# Altium PCB PowerMeter-v2.PcbDoc
Units mm, origin at the board's own origin, x right, y up, seen from the top; angles counter-clockwise.
Board outline 35 x 45 mm, 2 copper layers (Top Layer (Base Layer 1), Bottom Layer), stack 1.4 mm thick; 22 components, 44 nets, 48 pads, 17 vias.
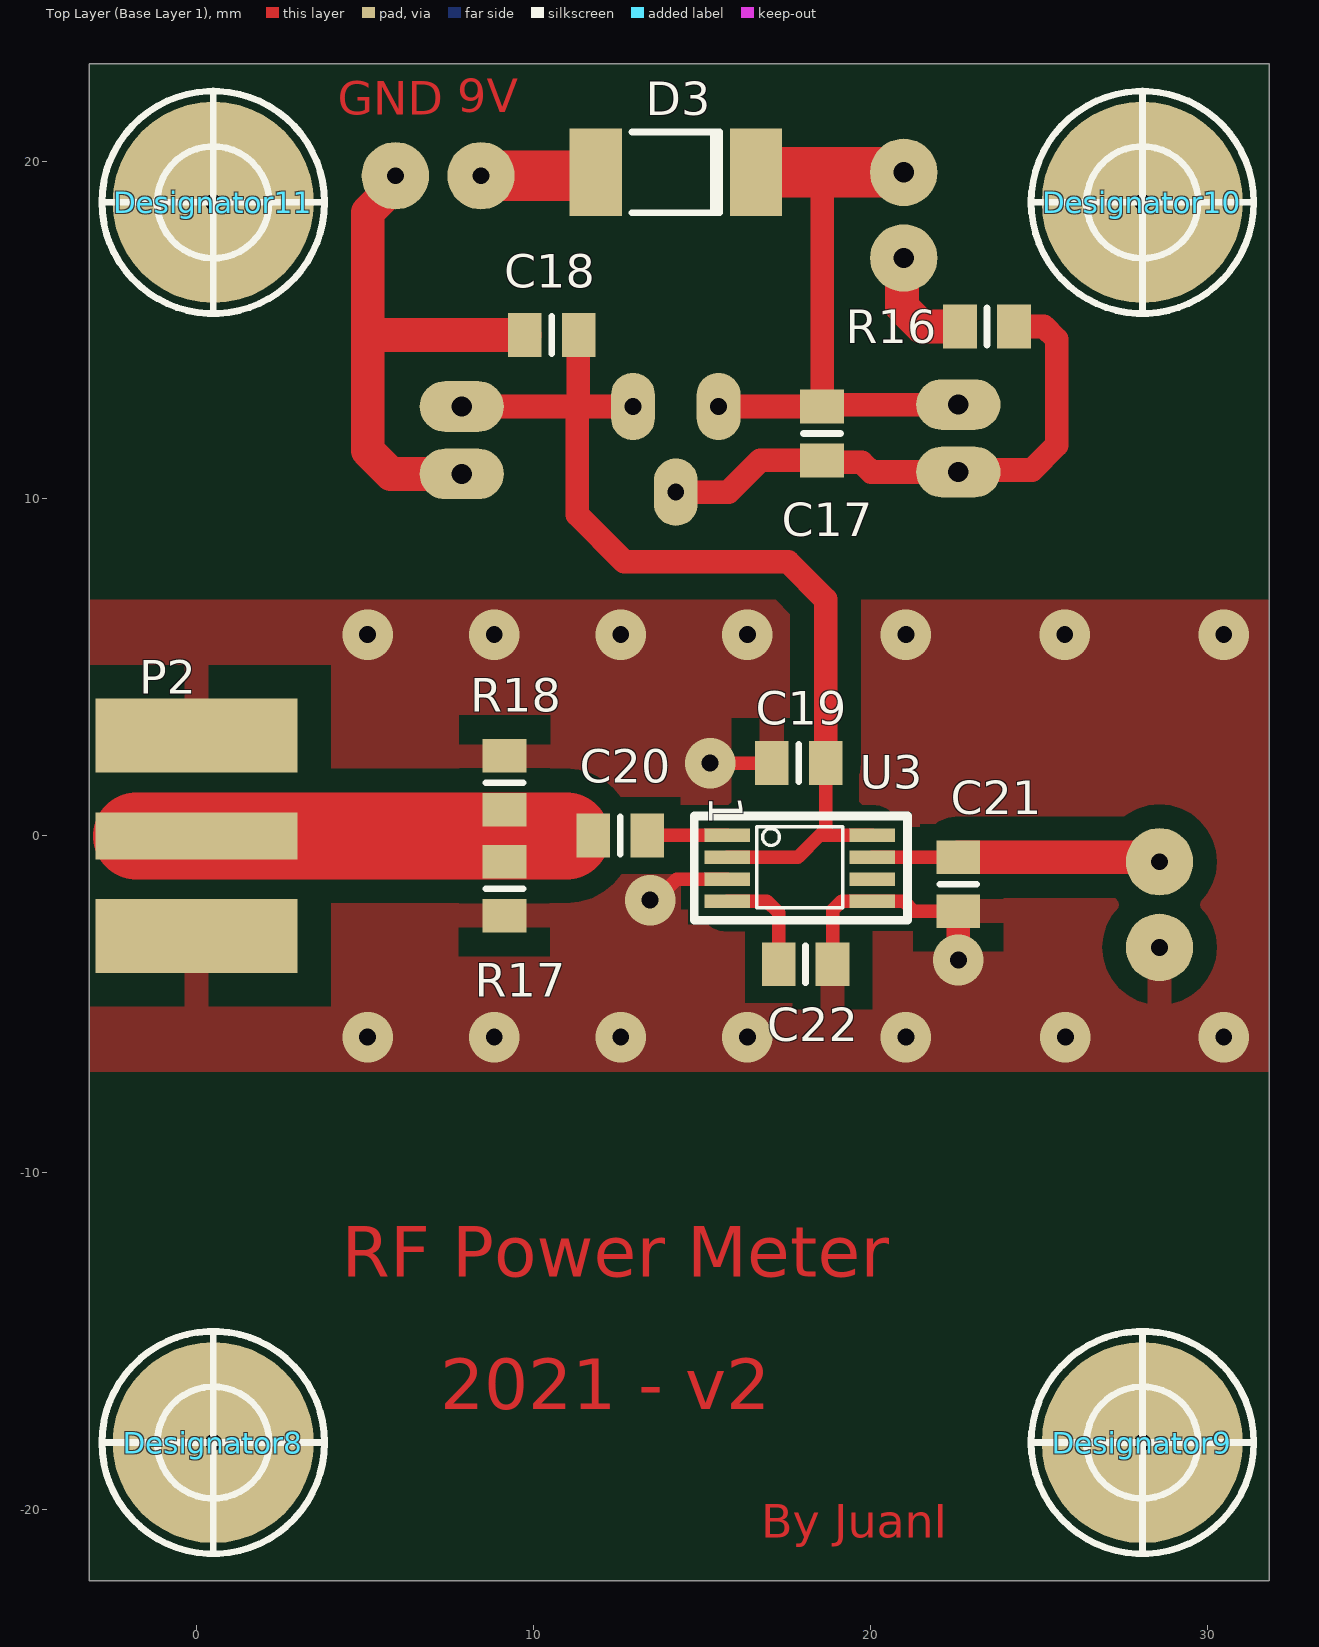
[diagram p0: Top Layer (Base Layer 1) view]
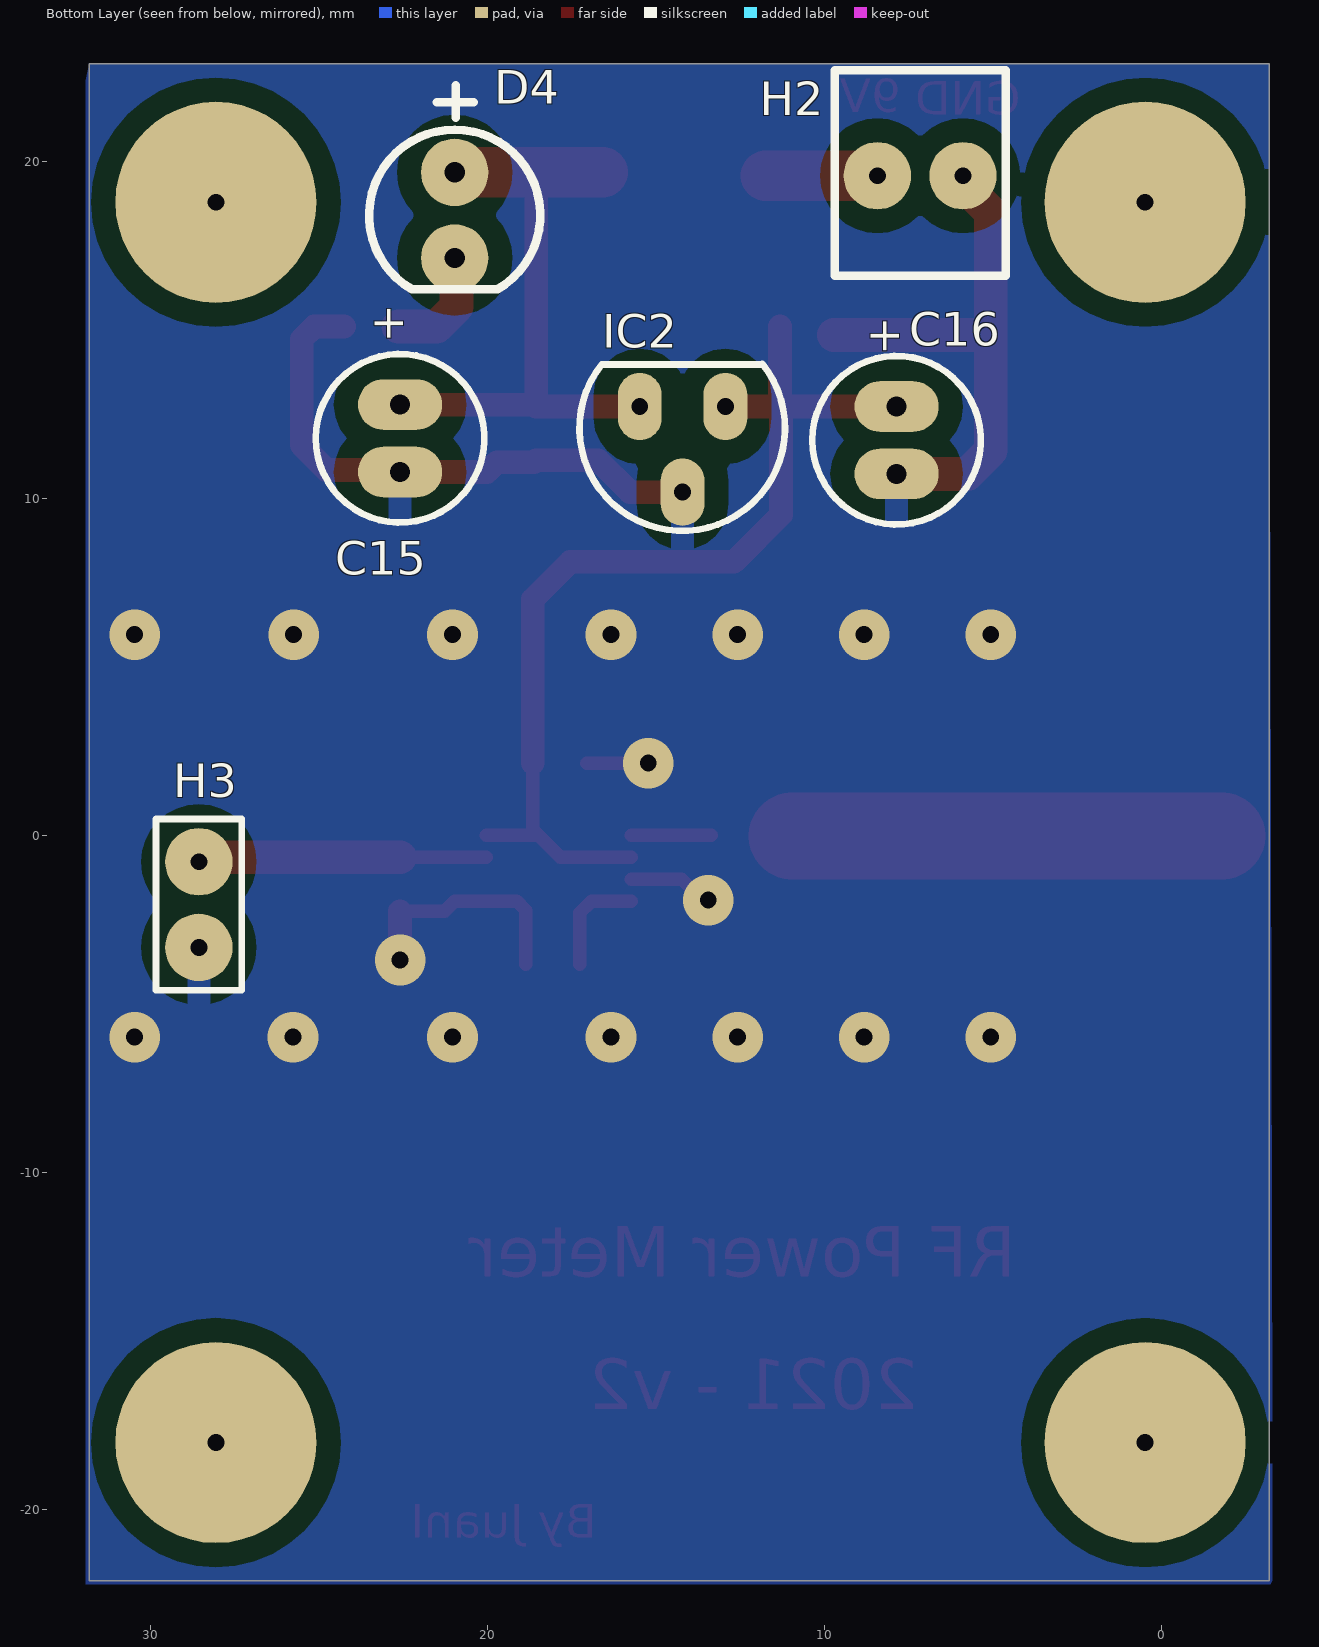
[diagram p1: Bottom Layer view, seen from below]
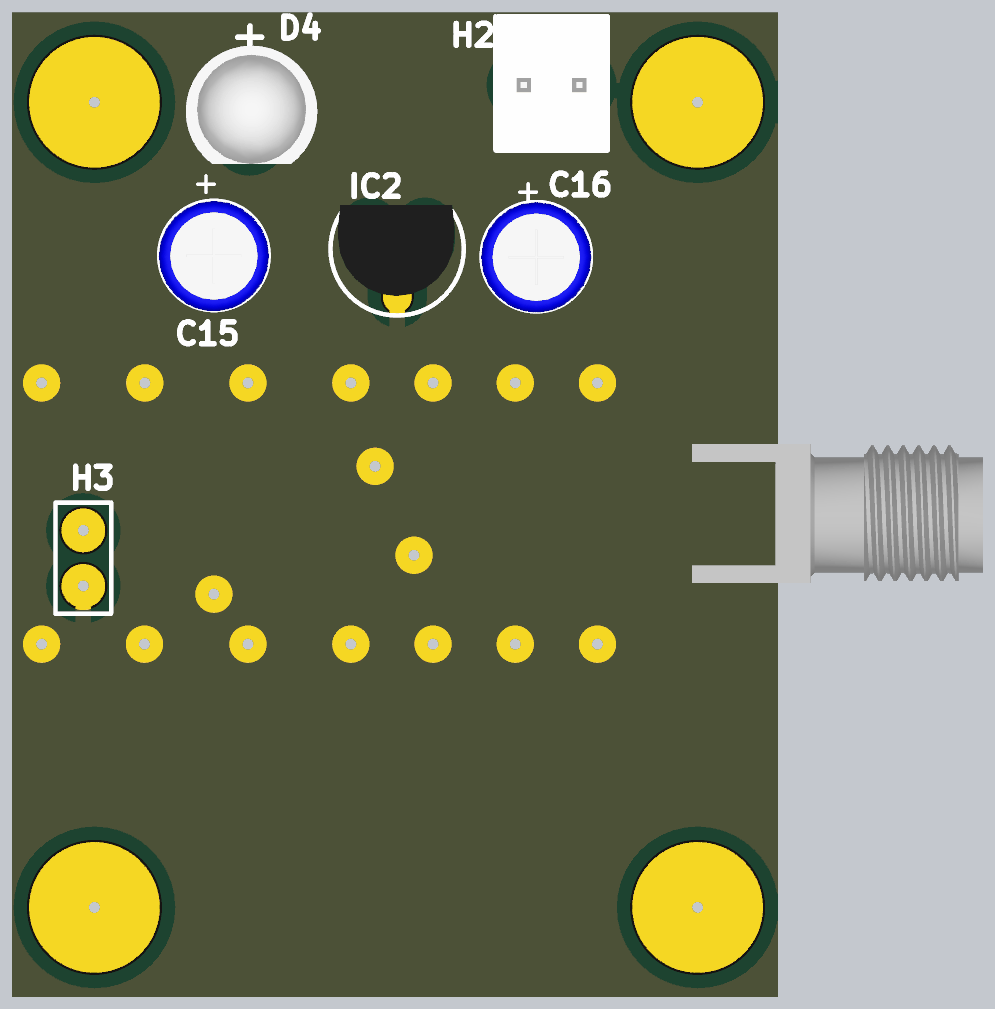
[diagram p2: 3D render of the assembled board from below, using the file's embedded part models]

## Layer stack, top to bottom
Top Layer (Base Layer 1): signal copper 0.035
Dielectric: dielectric 1.33, FR-4, Dk 4.3
Bottom Layer: signal copper 0.035

## Board outline
-3.175,-22.098 -3.175,22.902 31.825,22.902 31.825,-22.098
cut-out: 52.197,-8.255

## Design rules (kind name [scope] priority, off if disabled: settings)
Clearance [All] p1: gap=0.5 ignorepadtopadclearanceinfootprint=TRUE except(0: Arc-Hole Track-Hole SMDPad-Hole THPad-Hole Via-Hole Fill-Hole Poly-Hole Region-Hole Text-Hole; 0.2: Arc-Arc Arc-Track Arc-SMDPad Track-Track Track-SMDPad SMDPad-SMDPad; 0.254: Fill-Fill Fill-Poly Fill-Region Fill-Text Poly-Poly Poly-Region Poly-Text Region-Region Region-Text Text-Text; 0.4: Arc-Via Track-Via; 0.7: Arc-Fill Arc-Poly Arc-Region Track-Fill Track-Poly Track-Region THPad-Fill THPad-Poly THPad-Region; 2: Via-Via Via-Fill Via-Poly Via-Region Via-Text)
ComponentClearance [All] p1: gap=0.1 collisioncheckmode=3 verticalgap=1 showdistances=FALSE
MinimumSolderMaskSliver [All] p1: minsoldermaskwidth=0.01
PlaneClearance [All] p1: clearance=1
PlaneConnect [All] p1: planeconnectstyle=Relief reliefexpansion=0.508 reliefentries=2 reliefconductorwidth=0.254 reliefairgap=0.254
PolygonConnect PolygonConnect_1 [HasFootprint('SMA PCB 0.8mm')] p1: connectstyle=Relief reliefconductorwidth=0.7 reliefentries=2 polygonreliefangle="90 Angle" airgapwidth=1
PolygonConnect [All] p2: thpad.connectstyle=Relief thpad.reliefconductorwidth=0.7 thpad.reliefentries=2 thpad.polygonreliefangle="90 Angle" thpad.airgapwidth=0.7 smdpad.connectstyle=Relief smdpad.reliefconductorwidth=0.7 smdpad.reliefentries=2 smdpad.polygonreliefangle="90 Angle" smdpad.airgapwidth=0.7 via.connectstyle=Direct via.reliefconductorwidth=0.7 via.reliefentries=2 via.polygonreliefangle="90 Angle" via.airgapwidth=0.7
RoutingVias [All] p1: holewidth=0.711 width=1.27 viastyle="Through Hole" minholewidth=0.4 minwidth=1.27 maxholewidth=0.711 maxwidth=2
SilkToSilkClearance [All] p1: silktosilkclearance=0.01
SilkToSolderMaskClearance [IsPad] p1: minsilkscreentomaskgap=0 clearancetoexposedcopper=TRUE
SolderMaskExpansion [All] p1: expansion=0.102
UnRoutedNet [All] p1: checkbadconnections=TRUE
Width [InNetClass('50 Ohm')] p1: maxlimit=3 minlimit=2.58 preferedwidth=2.58 toplayer_maxwidth=2.971 impedanceprofiledriven=TRUE impedanceprofileid={9BF1AD61-A7E3-4C97-B076-DD0AFEE5174F} minimp=50.000000 maximp=50.000000 favimp=50.000000 // 50 Ohm
Width Width_1 [All] p2: maxlimit=2 minlimit=0.2 preferedwidth=0.4
23 further rules are at their usual default settings.

## Classes and differential pairs
net class "50 Ohm": NetC20_1
component class PowerMeterV2: C15 C16 C17 C18 C19 C20 C21 C22 D3 D4 H2 IC2 P2 R16 R17 R18 U3

## Components (designator, comment, footprint, x,y, rotation, side; value= is the part's Value field where it differs from the comment)
C15 "Cap Pol1" CAPPR2-5x11 22.606,11.795 r270 bottom value=10uF
C16 "Cap Pol1" CAPPR2-5x11 7.874,11.738 r270 bottom value=2.2uF
C17 "" 6-0805_L 18.563,11.938 r90 top value=10nF
C18 "" 6-0805_L 10.541,14.859 r0 top value=10nF
C19 "Cap" 6-0805_L 17.869,2.159 r0 top value=100nF
C20 "" 6-0805_L 12.573,0.015 r0 top value=1nF
C21 "Cap" 6-0805_L 22.606,-1.435 r270 top value=10nF
C22 "Cap" 6-0805_L 18.074,-3.81 r0 top value=100pF
D3 "1N400X" MELF 14.225,19.685 r0 top
D4 "LED Verde" LED 20.985,19.685 r270 bottom
Designator8 "Comment" "AGUJERO 1/8\"" 0.5,-18 r0 top
Designator9 "Comment" "AGUJERO 1/8\"" 28.067,-18 r0 top
Designator10 "Comment" "AGUJERO 1/8\"" 28.067,18.796 r0 top
Designator11 "Comment" "AGUJERO 1/8\"" 0.5,18.796 r0 top
H2 "Header 2 (Molex)" "Header 2 (Molex)" 8.444,19.585 r180 bottom
H3 "Header 2" HDR1X2 28.575,-0.77 r270 bottom
IC2 "78Lxx" "TO-92 (2)" 14.224,12.738 r90 bottom
P2 "SMA PCB 0.8mm" "SMA PCB 0.8MM" 0,0 r0 top
R16 "" 6-0805_L 23.457,15.113 r180 top value=2.2K
R17 "" 6-0805_L 9.141,-1.57 r270 top value=100
R18 "" 6-0805_L 9.144,1.575 r270 top value=100
U3 "MAX9933" "8L uMAX" 15.748,0.015 r0 top

## Footprints (in the part's own frame and the unit in brackets; to place one, negate y for a bottom-side part, rotate by r counter-clockwise, add the part's x,y. Pads: shape width x height; smd on the part's side, far side on the other; paste and mask are expansions set on the pad)
6-0805_L [mm] "Chip Resistor, Body 2.0x1.2mm, IPC High Density"
  rect 1x1.3 smd: 1(-0.8,0) 2(0.8,0)
  silkscreen extent 0,-0.55 0,0.55, body extent -1.07,-0.7 1.07,0.7, height 0.7
"8L uMAX" [mm] "8 PIN SMD PACKAGE for MAX9933"
  rect 1.35x0.4 smd: 1(0,0) 2(0,-0.65) 3(0,-1.3) 4(0,-1.95) 5(4.3,-1.95) 6(4.3,-1.3) 7(4.3,-0.65) 8(4.3,0)
  silkscreen extent -0.97,-2.52 5.35,0.58, body extent -0.4,-2.47 4.6,0.53, height 0.95
"AGUJERO 1/8\"" [mil] "Agujero pasante para tornillo de 1/8\" de diámetro"
  round 235 hole 19.68: 1(0,0)
  silkscreen extent -130,-130 130,130
CAPPR2-5x11 [mm] "Capacitor, Electrolytic, Radial; Body 5 x 11 mm (Dia.xH typ); Pin Spacing 2 mm (typ)"
  oval 1.5x2.5 hole 0.6: 1(-1,0) 2(1,0)
  silkscreen extent -2.5,-2.5 2.5,2.5, body extent -2.5,-2.53 2.55,2.53, height 11.53
HDR1X2 [mm] "Connector; Header; 2 Position"
  round 2 hole 0.5: 1(0,0) 2(2.54,0)
  silkscreen extent -1.27,-1.27 3.81,1.27
"Header 2 (Molex)" [mm] "2-Pin Header with Lock (0_100in pitch)"
  round 2 hole 0.5: 1(0,0) 2(2.54,0)
  silkscreen extent -1.27,-2.97 3.81,3.12, body extent -1.27,-3.1 13,3.4, height 22.91
LED [mm]
  round 2 hole 0.6: 1(0,0) 2(2.54,0)
  silkscreen extent -2.59,-2.54 3.47,2.54, body extent -1.7,-2.91 3.72,3.11, height 8.81
MELF [mm] "Metal Electrode Face (MELF) Diode; Body 5 x 2.5 mm (LxDia)"
  rect 1.55x2.6 smd: 1(-2.375,0) 2(2.375,0)
  silkscreen extent -1.3,-1.2 1.3,1.2, body extent -2.55,-1.25 2.45,1.25, height 2.55
"SMA PCB 0.8MM" [mm]
  rect 6x1.4 smd: 1(0,0)
  rect 6x2.2 smd: 2(0,-2.975) 2(0,2.975)
  body extent -12.55,-3.18 0.75,3.18, height 22.91
"TO-92 (2)" [mm] "TO, 3 pines axiales en triangulo, Diametro del cuerpo: 180mil (4.58mm), Pitch: 50mil (1.27mm)"
  oval 2x1.3 hole 0.5 paste+0: 1(0,-1.27) 2(-2.54,0) 3(0,1.27)
  silkscreen extent -3.69,-3.04 1.27,3.06, body extent -2.8,-2.61 1.36,2.71, height 7.33

## Part data
C15 C16: "Polarized Capacitor (Radial)", LatestRevisionDate=17-Jul-2002, LatestRevisionNote="Re-released for DXP Platform.", PackageReference=RB7.6-15, Published=8-Jun-2000, Publisher="Altium Limited"
C17 C18 C20: library part Cap, "Capacitor", LatestRevisionDate=17-Jul-2002, LatestRevisionNote="Re-released for DXP Platform.", PackageReference=RAD-0.3, Published=8-Jun-2000, Publisher="Altium Limited"
  C20: PackageDescription="Radial Cap, Thru-Hole; 2 Leads; 0.3 in Pin Spacing"
C19 C21 C22: "Capacitor", LatestRevisionDate=17-Jul-2002, LatestRevisionNote="Re-released for DXP Platform.", PackageDescription="Radial Cap, Thru-Hole; 2 Leads; 0.3 in Pin Spacing", PackageReference=RAD-0.3, Published=8-Jun-2000, Publisher="Altium Limited"
D3: library part Diode, "Default Diode", Code_JEDEC=DO-214-AB, LatestRevisionDate=17-Jul-2002, LatestRevisionNote="Re-released for DXP Platform.", PackageReference=SMC, PackageVersion=Sep-1996, Published=8-Jun-2000, Publisher="Altium Limited"
D4: library part LED0, "Typical INFRARED GaAs LED", LatestRevisionDate=08-Jul-2005, LatestRevisionNote="Mech Layer 1 removed.", PackageReference=LED-0, Published=8-Jun-2000, Publisher="Altium Limited"
H2: "2-Pin Header with Lock (0_100in pitch)"
H3: "Header, 2-Pin", LatestRevisionDate=17-Jul-2002, LatestRevisionNote="Re-released for DXP Platform.", Publisher="Altium Limited"
IC2: "Regulador fijo de tensión positiva 100mA", Nombre=LM78L05
R16 R17 R18: library part Res1, "Resistor", LatestRevisionDate=17-Jul-2002, LatestRevisionNote="Re-released for DXP Platform.", PackageReference=AXIAL-0.3, Published=8-Jun-2000, Publisher="Altium Limited"
U3: "RF LOG DETECTOR"

## Via types
v1: diameter 1.5, hole 0.5, Top Layer (Base Layer 1) to Bottom Layer, 17 vias

## Nets (pads, with @x,y where several pads share a name; then routed paths per layer and width w, separated by ;. In a path a pad name is that pad's centre, name@x,y a point inside that pad or via, vN(x,y) a via of type N, cw(c..) or ccw(c..) an arc to the next point about the centre after c; other vN are vias at no path point)
A: 
BKGD: 
D0: 
D1: 
D2: 
D3: 
D4: 
D5: 
D6: 
D7: 
E: 
GND: C15.2 C16.2 C17.1 C18.1 C19.1 C21.2 C22.2 H2.2 H3.2 IC2.2 P2.2 R16.1 R17.2 R18.1 U3.3 U3.5 | length 44.4
  Top Layer (Base Layer 1) w0.4: v1(13.462,-1.905) 13.626,-1.905 14.246,-1.285 U3.3 ; v1(15.24,2.159) C19.1 ; C22.2 18.874,-2.204 19.143,-1.935 U3.5 20.985,-1.935 21.285,-2.235 C21.2
  Top Layer (Base Layer 1) w0.7: IC2.2 15.786,10.198 16.726,11.138 C17.1 18.619,11.082 19.741,11.082 20.028,10.795 C15.2 22.667,10.856 24.791,10.856 25.527,11.592 25.527,14.732 25.146,15.113 R16.1 ; v1(22.606,-3.683) C21.2
  Top Layer (Base Layer 1) w1: H2.2 5.904,19.323 5.08,18.499 5.08,14.965 ; C16.2 5.772,10.738 5.08,11.43 5.08,14.965 ; C18.1 5.186,14.859 5.08,14.965
  other v1: 5.08,-5.969 8.836,-5.969 12.592,-5.969 16.348,-5.969 21.05,-5.969 25.781,-5.969 30.48,-5.969 5.08,5.969 8.836,5.969 12.592,5.969 16.348,5.969 21.05,5.969 25.765,5.969 30.48,5.969
"NetAmp. 500mA_1": 
"NetAmp. 500mA_2": 
NetBacklight_2: 
NetC1_1: 
NetC6_2: 
NetC8_1: 
NetC8_2: 
NetC10_1: 
NetC12_2: 
NetC13_2: 
NetC15_1: C15.1 C17.2 D3.2 D4.1 IC2.3 | length 18.5
  Top Layer (Base Layer 1) w0.7: IC2.3 C17.2 ; 18.567,19.685 18.563,19.681 C17.2 ; C15.1 18.62,12.795 C17.2
  Top Layer (Base Layer 1) w1.5: D3.2 18.567,19.685 D4.1
NetC20_1: C20.1 P2.1 R17.1 R18.2 | length 12.8
  Top Layer (Base Layer 1) w2.58: P2.1@-1.778,0 P2.1 9.141,0 10.975,0
NetC20_2: C20.2 U3.1 | length 2.4
  Top Layer (Base Layer 1) w0.4: C20.2 U3.1
NetC22_1: C22.1 U3.4 | length 3.2
  Top Layer (Base Layer 1) w0.4: U3.4 16.923,-1.935 17.274,-2.286 C22.1
NetD1_1: 
NetD2_2: 
NetD3_1: D3.1 H2.1 | length 3.4
  Top Layer (Base Layer 1) w0.4: D3.1@11.75,19.585 D3.1
  Top Layer (Base Layer 1) w1.5: H2.1 D3.1@11.75,19.585
NetD4_2: D4.2 R16.2 | length 3.6
  Top Layer (Base Layer 1) w1: D4.2@20.972,17.272 20.93,17.23 20.93,17.145 20.932,17.143 20.932,15.697 21.516,15.113 R16.2
NetH1_2: 
NetP1_1: 
NetR2_2: 
NetR8_2: 
NetS2_1: 
NetS3_1: 
NetS4_1: 
NetS5_1: 
out: C21.1 H3.1 U3.7 | length 8.6
  Top Layer (Base Layer 1) w0.4: U3.7 C21.1
  Top Layer (Base Layer 1) w0.6: H3.1@28.44,-0.635 H3.1
  Top Layer (Base Layer 1) w1: C21.1 H3.1@28.44,-0.635
RESET: 
RS: 
V0: 
Vdd: C16.1 C18.2 C19.2 IC2.1 U3.2 U3.8 | length 30.7
  Top Layer (Base Layer 1) w0.4: U3.2 17.848,-0.635 18.498,0.015 ; C19.2 18.669,0.186 18.498,0.015 ; U3.8 18.498,0.015
  Top Layer (Base Layer 1) w0.7: C16.1 11.303,12.738 ; C18.2@11.333,15.113 11.333,12.768 11.303,12.738 ; IC2.1 11.303,12.738 ; C19.2 18.669,7.017 17.558,8.128 12.7,8.128 11.303,9.525 11.303,12.738
Vout: 
pads on no net: Designator8.1 Designator9.1 Designator10.1 Designator11.1 U3.6

## Polygon pours and split planes (outlines as drawn)
GND on Bottom Layer "GND_Poly_bottom" (solid, pour order 8): -3.175,22.902 31.825,22.902 31.925,22.4 31.925,-22.198 -3.218,-22.198 -3.277,-22.095
no net on Bottom Layer "Bottom Layer-No Net" (solid, pour order 0): 0.508,21.209
GND on Top Layer (Base Layer 1) "GND_Poly" (solid, pour order 6): -3.175,7 31.825,7 31.825,-7 -3.175,-7

## Other copper
Top Layer (Base Layer 1):
  text "9V" at 7.744,21.463 h1
  text "GND" at 4.191,21.393 h1
  text "RF Power Meter" at 4.318,-13.081 h1.5
  text "2021 - v2" at 7.239,-17.018 h1.5
  text "By JuanI" at 16.764,-20.828 h1

## Silkscreen, mask and mechanical layers (free items; w line width, h text height)
Mechanical 1:
  the board outline again, w0.2

## Text inside footprints (layer, text, board x,y; h text height)
C15: Bottom Overlay "+" at 23.356,15.77 h1 r90
C16: Bottom Overlay "+" at 8.636,15.405 h1 r90
U3: Top Overlay "1" at 15.223,1.19 h1 r270